# Altium PCB OAmp_TestBoard.PcbDoc
Units mm, origin at the board's own origin, x right, y up, seen from the top; angles counter-clockwise.
Board outline 152.4 x 101.6 mm, 2 copper layers (Top Layer, Bottom Layer); 5 components, 14 nets, 38 pads, 0 vias.
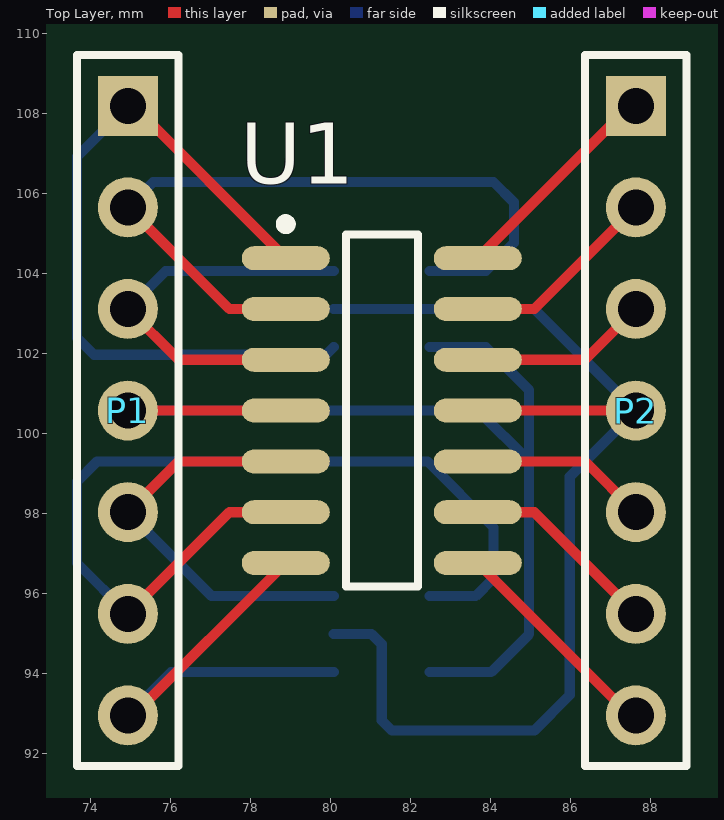
[diagram p0: Top Layer view]
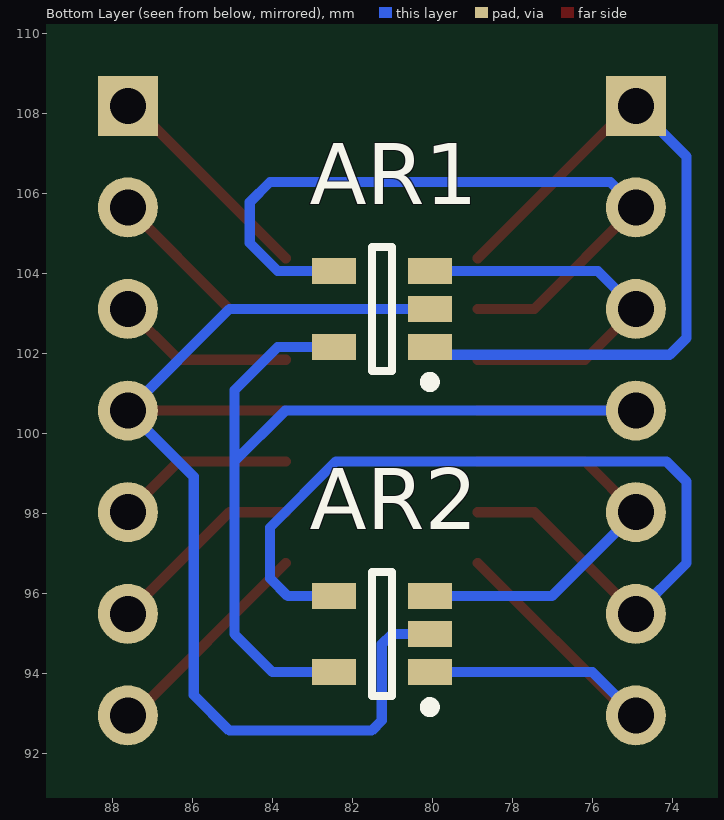
[diagram p1: Bottom Layer view, seen from below]

## Layer stack, top to bottom
Top Layer: signal copper 0.0356
Dielectric: dielectric 0.32, FR-4, Dk 4.8
Bottom Layer: signal copper 0.0356

## Board outline
25.4,25.4 177.8,25.4 177.8,127 25.4,127

## Design rules (kind name [scope] priority, off if disabled: settings)
Clearance [All] p1: gap=0.254
PolygonConnect [All] p1: connectstyle=Relief reliefconductorwidth=0.254 reliefentries=4 polygonreliefangle="90 Angle"
RoutingVias [All] p1: holewidth=0.711 width=1.27 viastyle="Through Hole" minholewidth=0.711 minwidth=1.27 maxholewidth=0.711 maxwidth=1.27
SilkscreenOverComponentPads [All] p1: minsilkscreentomaskgap=0.254
SolderMaskExpansion [All] p1: expansion=0.102
Width [All] p1: maxlimit=0.254 minlimit=0.254 preferedwidth=0.254
27 further rules are at their usual default settings.

## Components (designator, comment, footprint, x,y, rotation, side; value= is the part's Value field where it differs from the comment)
AR1 "Op Amp" SOT-23-OT5_N 81.28,103.124 r0 bottom
AR2 "Op Amp" SOT-23-OT5_N 81.28,94.996 r0 bottom
P1 "Header 7" HDR1X7 74.93,108.204 r270 top
P2 "Header 7" HDR1X7 87.63,108.204 r270 top
U1 "LM324AD" SO14_N 81.28,100.584 r0 top

## Footprints (in the part's own frame and the unit in brackets; to place one, negate y for a bottom-side part, rotate by r counter-clockwise, add the part's x,y. Pads: shape width x height; smd on the part's side, far side on the other; paste and mask are expansions set on the pad)
HDR1X7 [mm] "Connector; Header; 7 Position"
  rect 1.5x1.5 hole 0.9: 1(0,0)
  round 1.5 hole 0.9: 2(2.54,0) 3(5.08,0) 4(7.62,0) 5(10.16,0) 6(12.7,0) 7(15.24,0)
  silkscreen extent -1.27,-1.27 16.51,1.27
SO14_N [mm] "SOIC, 14-Leads, Body 8.7x3.9mm, Pitch 1.27mm, IPC Medium Density"
  oval 2.2x0.6 smd: 1(-2.4,3.81) 2(-2.4,2.54) 3(-2.4,1.27) 4(-2.4,0) 5(-2.4,-1.27) 6(-2.4,-2.54) 7(-2.4,-3.81) 8(2.4,-3.81) 9(2.4,-2.54) 10(2.4,-1.27) 11(2.4,0) 12(2.4,1.27) 13(2.4,2.54) 14(2.4,3.81)
  silkscreen extent -2.52,-4.4 0.9,4.78, body extent -1.95,-4.33 1.95,4.33, height 1.75
SOT-23-OT5_N [mm] "SOT23, 5-Leads, Body 2.9x1.6mm, Pitch 0.95mm, Lead Span 2.7mm, IPC Medium Density"
  rect 1.1x0.65 smd: 1(-1.2,0.95) 2(-1.2,0) 3(-1.2,-0.95) 4(1.2,-0.95) 5(1.2,0.95)
  silkscreen extent -1.32,-1.55 0.25,1.95, body extent -0.9,-1.55 0.9,1.55, height 1.45

## Part data
AR1 AR2: "FET Operational Amplifier"
P1 P2: "Header, 7-Pin"
U1: "Low-Power Quad Operational Amplifier"

## Nets (pads, with @x,y where several pads share a name; then routed paths per layer and width w, separated by ;. In a path a pad name is that pad's centre, name@x,y a point inside that pad or via, vN(x,y) a via of type N, cw(c..) or ccw(c..) an arc to the next point about the centre after c; other vN are vias at no path point)
GND: AR1.2 AR2.2 P2.4 U1.11 | length 28.7
  Top Layer w0.254: U1.11 P2.4
  Bottom Layer w0.254: AR2.2 81.026,94.996 81.28,94.742 81.28,92.837 81.534,92.583 85.09,92.583 85.979,93.472 85.979,98.933 P2.4 85.09,103.124 AR1.2
IN1+: AR1.3 P1.3 U1.3 | length 10
  Top Layer w0.254: P1.3 76.2,101.854 U1.3
  Bottom Layer w0.254: P1.3 75.88,104.074 AR1.3
IN1-: AR1.4 P1.2 U1.2 | length 18.5
  Top Layer w0.254: P1.2 77.47,103.124 U1.2
  Bottom Layer w0.254: P1.2 75.565,106.299 84.074,106.299 84.582,105.791 84.582,104.775 83.881,104.074 AR1.4
IN2+: AR2.3 P1.5 U1.5 | length 10.5
  Top Layer w0.254: P1.5 76.2,99.314 U1.5
  Bottom Layer w0.254: P1.5 77.028,95.946 AR2.3
IN2-: AR2.4 P1.6 U1.6 | length 23.8
  Top Layer w0.254: P1.6 77.47,98.044 U1.6
  Bottom Layer w0.254: P1.6 73.66,96.774 73.66,98.806 74.168,99.314 76.835,99.314 ; 76.2,99.314 76.835,99.314 ; AR2.4 83.627,95.946 84.074,96.393 84.074,97.663 82.423,99.314 76.835,99.314
IN3+: P2.5 U1.10 | length 4.5
  Top Layer w0.254: U1.10 86.36,99.314 P2.5
IN3-: P2.6 U1.9 | length 5
  Top Layer w0.254: U1.9 85.09,98.044 P2.6
IN4+: P2.3 U1.12 | length 4.5
  Top Layer w0.254: U1.12 86.36,101.854 P2.3
IN4-: P2.2 U1.13 | length 5
  Top Layer w0.254: U1.13 85.09,103.124 P2.2
OUT1: AR1.1 P1.1 U1.1 | length 18.5
  Top Layer w0.254: P1.1@75,108.274 U1.1
  Bottom Layer w0.254: P1.1 73.66,106.934 73.66,102.406 74.085,101.981 79.887,101.981 AR1.1
OUT2: AR2.1 P1.7 U1.7 | length 11.1
  Top Layer w0.254: P1.7 75.07,92.964 U1.7
  Bottom Layer w0.254: P1.7 76.012,94.046 AR2.1
OUT3: P2.7 U1.8 | length 5.5
  Top Layer w0.254: U1.8 P2.7@87.56,92.894
OUT4: P2.1 U1.14 | length 5.4
  Top Layer w0.254: U1.14 P2.1@87.49,108.204
VCC: AR1.5 AR2.5 P1.4 U1.4 | length 26.4
  Top Layer w0.254: P1.4 U1.4
  Bottom Layer w0.254: P1.4 83.693,100.584 84.963,99.314 ; AR2.5 84.013,94.046 84.963,94.996 84.963,99.314 ; AR1.5 83.881,102.174 84.963,101.092 84.963,99.314